# EAGLE board anti-spark-pcb (EAGLE 7.6.0)
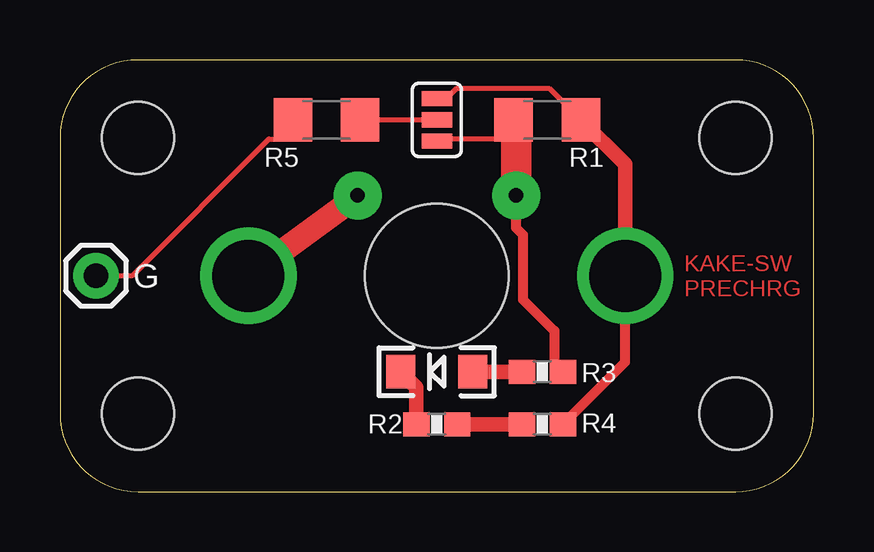
[diagram p0: board, top side]
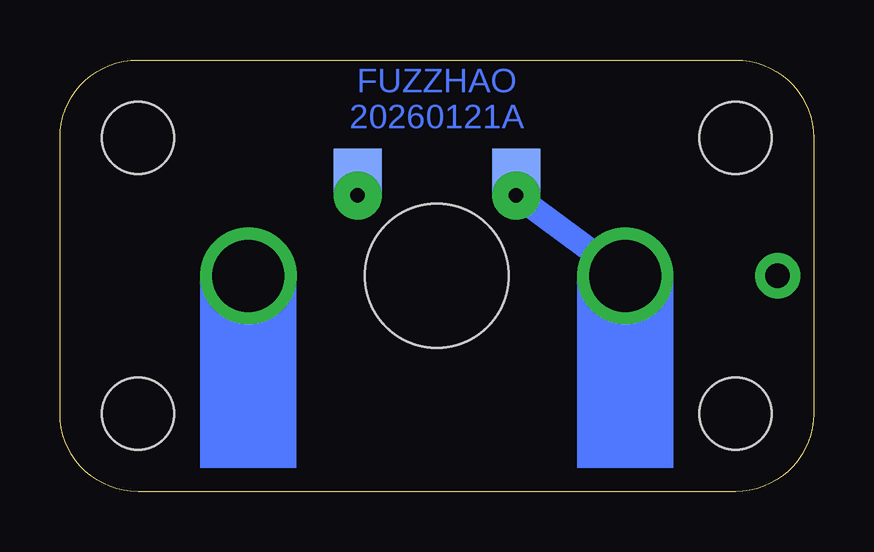
[diagram p1: board, bottom side, seen from below]

Size 31.4 x 18 mm. Coordinates in mm from the lower left corner, seen from the top.
Copper layers (1*16): Top 0.035mm / dielectric 1.5mm / Bottom 0.035mm
Design rules "default": minimum track width 10mil, minimum drill 24mil, track to track 8mil, track to pad 8mil, pad to pad 8mil, via to via 8mil, smd to smd 8mil, copper to edge 40mil, drill to drill 8mil, minimum pad ring 10mil, minimum via ring 8mil, stop-mask expansion 4mil, vias tented up to drill 0mil, thermal gap 10mil

## Footprints (pad centres in the part's own frame; a part is rotated, then mirrored left to right if it is on the bottom)
1X01 = drill 1.016 pad 1.88: 1 0,0
LED-1206 = smd 1.2 x 1.4: A -1.5,0; C 1.5,0
KAKE-SWITCH-PCB = drill 3: A1 7.85,9; A2 23.55,9 | drill 0.6 pad 2: B1 12.4,12.347; B2 19,12.347 | smd 2 x 2 bottom: P$1 12.4,13.3; P$2 19,13.3 | hole 3: 3.25,3.25; 3.25,14.75; 28.15,3.25; 28.15,14.75 | hole 6: 15.7,9
1206 = smd 1.6 x 1.8: 1 -1.4,0; 2 1.4,0
0603-RES = smd 1.1 x 1: 1 -0.85,0; 2 0.85,0
SJ_3 = smd 0.635 x 1.27: 1 -0.889,0; 2 0,0; 3 0.889,0

## Placement (x,y rotation side)
JP1  M01PTH  [1X01]  1.5,9 0 top
LED1  [LED-1206]  15.7,5 180 top
PCB1  KAKE-SWITCH-PCB  [KAKE-SWITCH-PCB]  0,0 0 top
R1  39R / RCS120639R0FKEA  [1206]  20.3,15.5 180 top
R2  470R  [0603-RES]  15.7,2.8 0 top
R3  0ZCM0001FF2G  [0603-RES]  20.1,5 180 top
R4  [0603-RES]  20.1,2.8 0 top
R5  [1206]  11.1,15.5 180 top
SJ1  [SJ_3]  15.7,15.5 270 top

## Library data of the parts
JP1 LED1 PCB1 R1-R5 SJ1 = anti-spark-pcb

## Nets
N$1: PCB1.B2 R1.2 R3.1 SJ1.3
N$2: PCB1.A2 R1.1 R4.2 SJ1.1
N$3: PCB1.A1 PCB1.B1
N$5: LED1.A R3.2
N$6: R2.2 R4.1
N$7: LED1.C R2.1
N$8: R5.1 SJ1.2
N$9: JP1.1 R5.2

## Tracks (layer width: path | path; a pad name or v marks a point on that pad's centre or on a via)
N$1
  Top 0.203: SJ1.3 15.8,14.71 18.21,14.71 R1.2 | 20.6,4.9 R3.1
  Top 0.406: 20.6,4.9 20.6,6.7 19.3,8 19.3,10.7 19,11 PCB1.B2
  Top 0.61: 19.3,15.5 R1.2
  Top 1.27: PCB1.B2 19,15.4 R1.2
N$2
  Top 0.203: R1.1 20.4,16.8 16.5,16.8 16.09,16.39 SJ1.1
  Top 0.406: R4.2 23.55,5.4 PCB1.A2
  Top 0.61: R1.1 23.55,13.65 PCB1.A2
N$3
  Bottom 1: PCB1.A1 PCB1.B1
N$4
  Top 1.016: 7.85,9 12.5,12.4
N$5
  Top 0.61: LED1.A R3.2
N$6
  Top 0.61: R2.2 R4.1
N$7
  Top 0.61: LED1.C 14.85,4.35 R2.1
N$8
  Top 0.203: SJ1.2 R5.1
N$9
  Top 0.203: JP1.1 3,9 8.7,14.7 9.7,14.7 R5.2

## Text on the board
Top: KAKE-SW / PRECHRG
Bottom: FUZZHAO / 20260121A
tNames: G
tStop: KAKE-SW / PRECHRG
bStop: FUZZHAO / 20260121A